# EAGLE board Our Project (EAGLE 9.2.0)
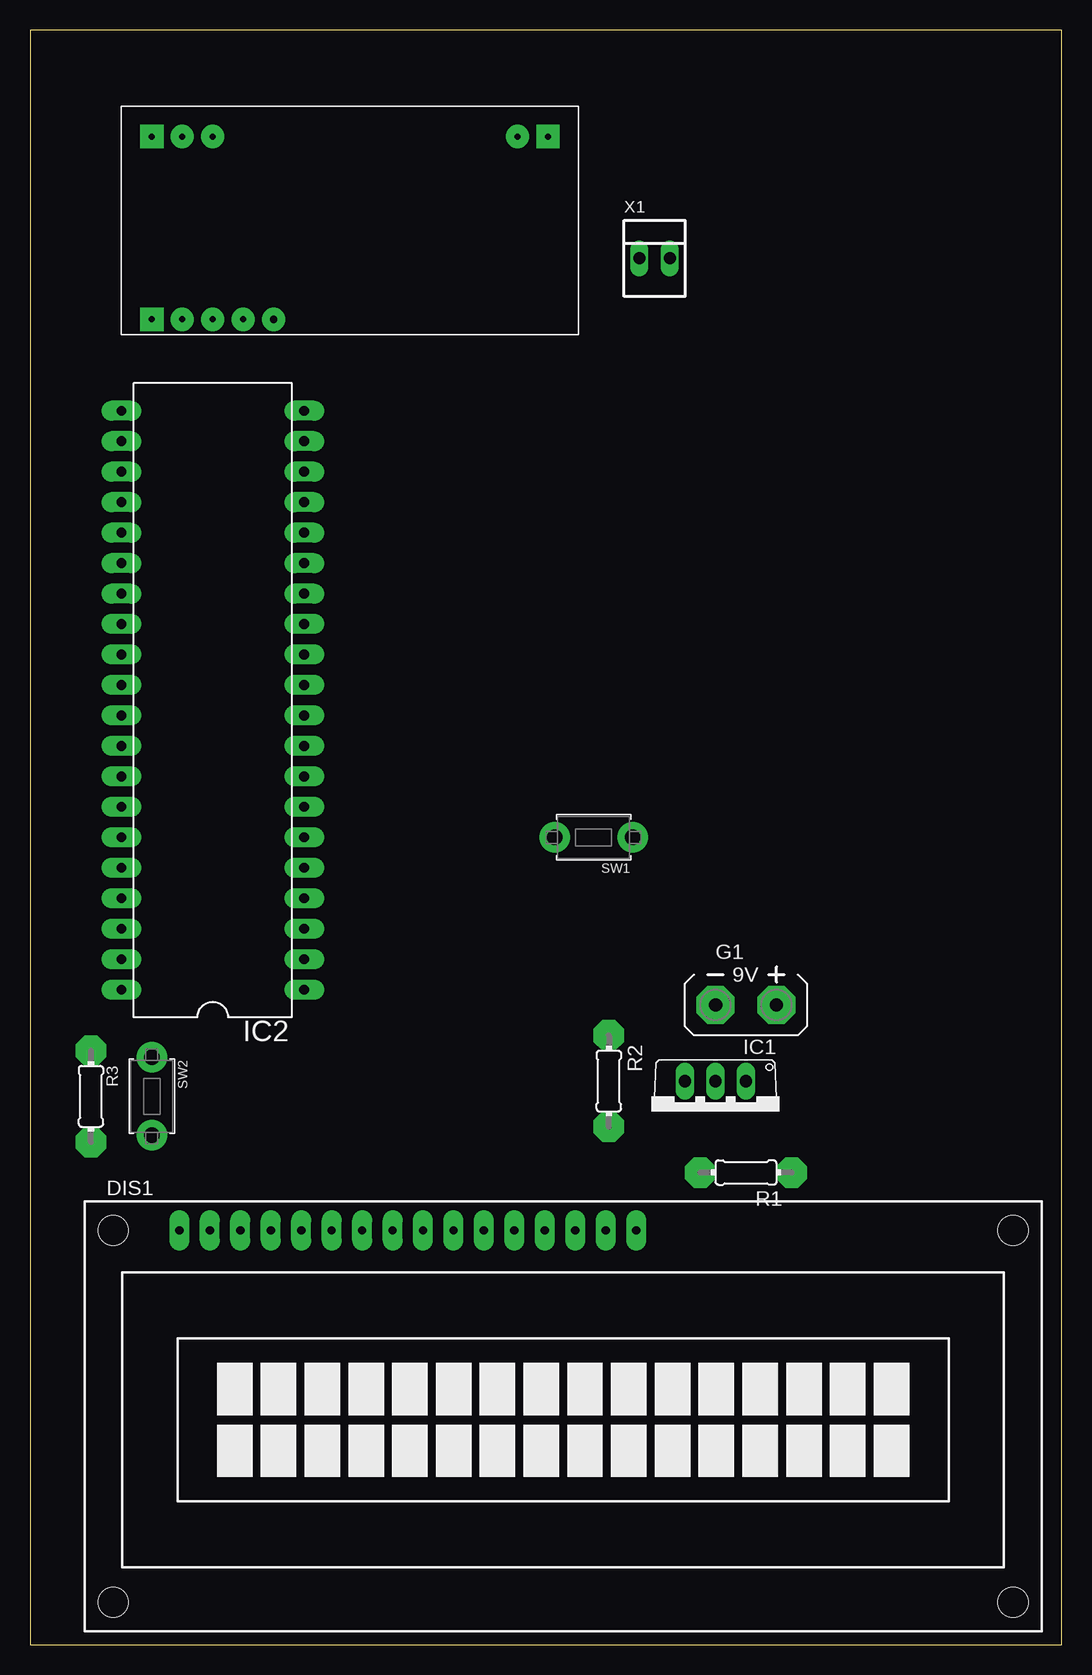
[diagram p0: board, top side]
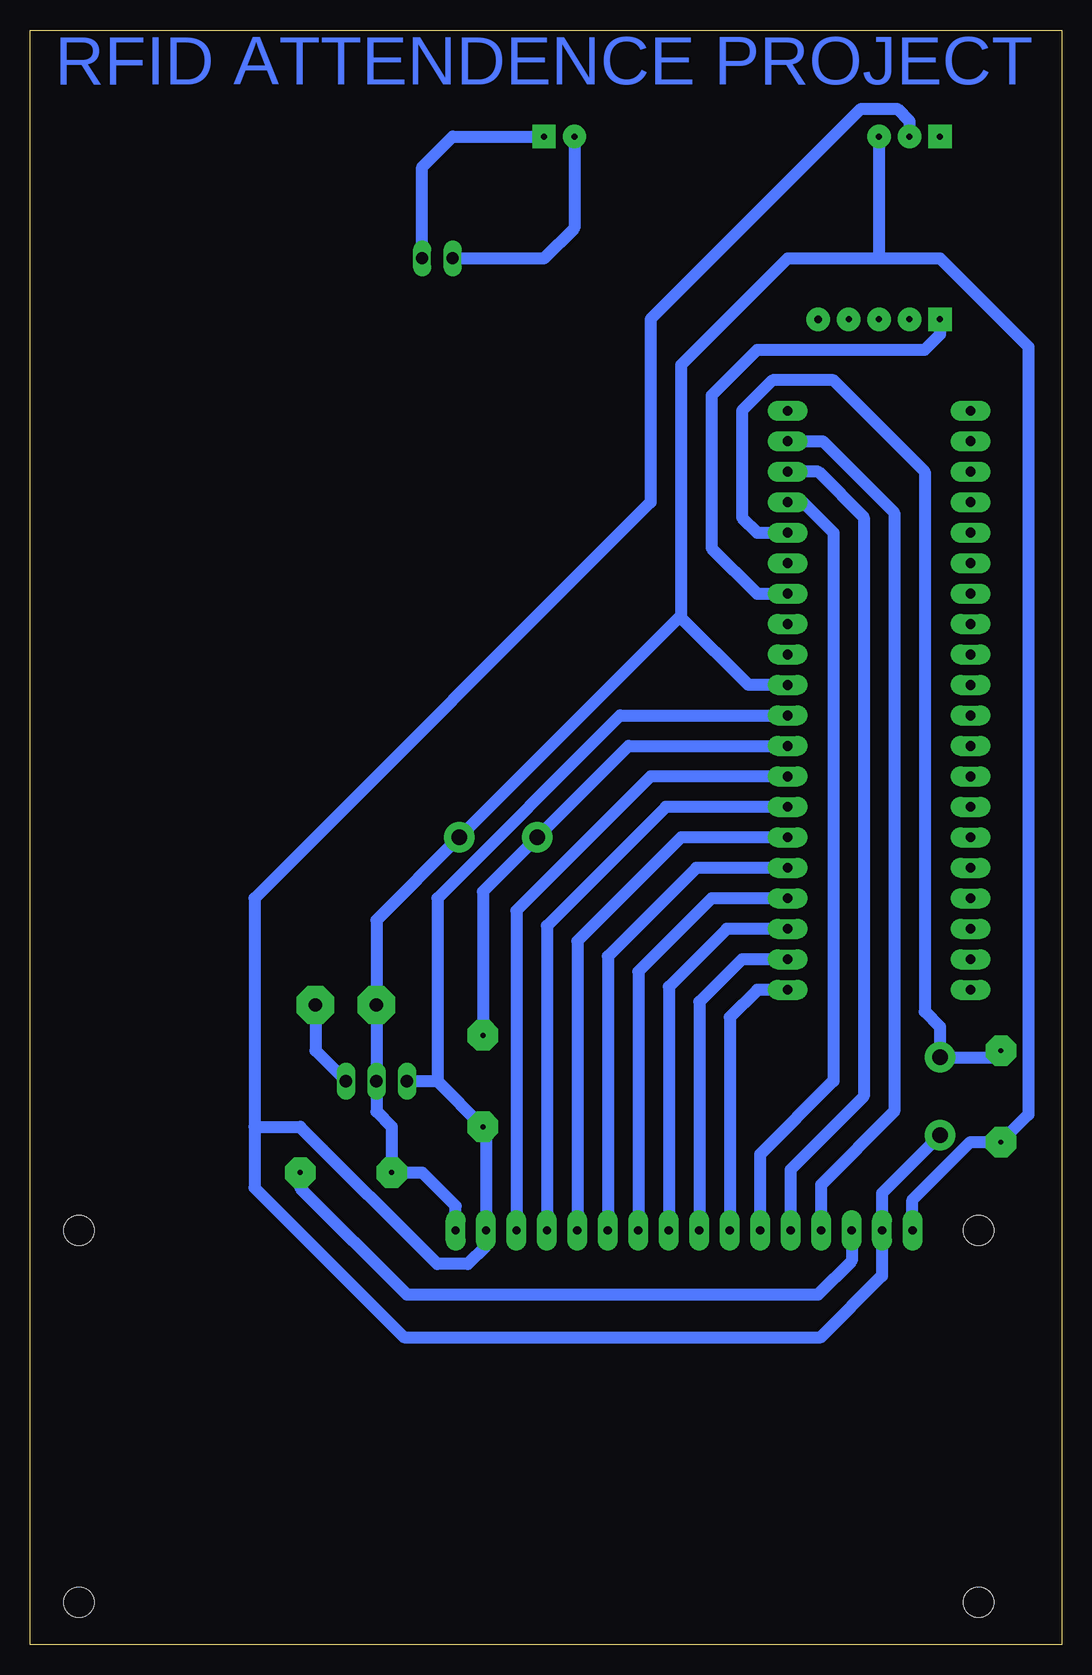
[diagram p1: board, bottom side, seen from below]

Size 86.03 x 134.61 mm. Coordinates in mm from the lower left corner, seen from the top.
Outline: 0,0 86.03,0 86.03,134.61 0,134.61 0,0
Copper layers (1*16): Top 0.035mm / dielectric 1.5mm / Bottom 0.035mm
Design rules "default": minimum track width 6mil, minimum drill 0.35mm, track to track 6mil, track to pad 6mil, pad to pad 6mil, via to via 6mil, smd to smd 6mil, copper to edge 40mil, drill to drill 6mil, minimum pad ring 10mil, minimum via ring 8mil, stop-mask expansion 4mil, vias tented up to drill 0mil, thermal gap 10mil

## Footprints (pad centres in the part's own frame; a part is rotated, then mirrored left to right if it is on the bottom)
TUXGR_16X2_R2 = drill 0.7 pad 1.676 long: 1 -32,15.5; 2 -29.46,15.5; 3 -26.92,15.5; 4 -24.38,15.5; 5 -21.84,15.5; 6 -19.3,15.5; 7 -16.76,15.5; 8 -14.22,15.5; 9 -11.68,15.5; 10 -9.14,15.5; 11 -6.6,15.5; 12 -4.06,15.5; 13 -1.52,15.5; 14 1.02,15.5; 15 3.56,15.5; 16 6.1,15.5 | hole 2.5: -37.5,-15.5; 37.5,-15.5; -37.5,15.5; 37.5,15.5
AB9V = drill 1.118 pad 3.15 octagon: + 0,2.54; - 0,-2.54
TO220V = drill 1.016 long: 1 -2.54,-2.54; 2 0,-2.54; 3 2.54,-2.54
DIL40 = drill 0.813 pad 1.676 long: 1 -24.13,-7.62; 2 -21.59,-7.62; 3 -19.05,-7.62; 4 -16.51,-7.62; 5 -13.97,-7.62; 6 -11.43,-7.62; 7 -8.89,-7.62; 8 -6.35,-7.62; 9 -3.81,-7.62; 10 -1.27,-7.62; 11 1.27,-7.62; 12 3.81,-7.62; 13 6.35,-7.62; 14 8.89,-7.62; 15 11.43,-7.62; 16 13.97,-7.62; 17 16.51,-7.62; 18 19.05,-7.62; 19 21.59,-7.62; 20 24.13,-7.62; 21 24.13,7.62; 22 21.59,7.62; 23 19.05,7.62; 24 16.51,7.62; 25 13.97,7.62; 26 11.43,7.62; 27 8.89,7.62; 28 6.35,7.62; 29 3.81,7.62; 30 1.27,7.62; 31 -1.27,7.62; 32 -3.81,7.62; 33 -6.35,7.62; 34 -8.89,7.62; 35 -11.43,7.62; 36 -13.97,7.62; 37 -16.51,7.62; 38 -19.05,7.62; 39 -21.59,7.62; 40 -24.13,7.62
0204/7 = drill 0.4 pad 2.54 octagon: 1 -3.81,0; 2 3.81,0
KIT.RFID.RDM6300 = drill 0.6 pad 1.93: +5(DC) 6.35,8.89 | drill 0.5 pad 1.93: +5(DC). 13.97,-6.35; ANT2 -13.97,-6.35; DATA1 13.97,8.89; GND 8.89,8.89; GND. 11.43,-6.35; P$12 11.43,8.89 | drill 0.5 pad 1.93 square: ANT1 -16.51,-6.35; DATA0 16.51,8.89; LED 16.51,-6.35
TACT_PANA-EVQ = drill 1.3 pad 2.54: P$1 -3.25,0; P$2 3.25,0
22-23-2021 = drill 1 long: 1 -1.27,0; 2 1.27,0

## Placement (x,y rotation side)
DIS1  TUXGR_16X2_R2  [TUXGR_16X2_R2]  44.45,19.05 0 top
G1  AB9V  [AB9V]  59.69,53.34 270 top
IC1  7805TV  [TO220V]  57.15,44.45 180 top
IC2  MEGA32-P  [DIL40]  15.24,78.74 90 top
R1  [0204/7]  59.69,39.37 180 top
R2  [0204/7]  48.26,46.99 270 top
R3  [0204/7]  5.08,45.72 270 top
RFID.MOKH1  KIT.RFID.RDM6300  [KIT.RFID.RDM6300]  26.67,119.38 180 top
SW1  [TACT_PANA-EVQ]  46.99,67.31 180 top
SW2  [TACT_PANA-EVQ]  10.16,45.72 270 top
X1  22-23-2021  [22-23-2021]  52.07,115.57 0 top

## Library data of the parts
DIS1 = display-lcd; OC_FARNELL: unknown; OC_NEWARK: unknown
G1 = battery
IC1 = linear
IC2 = atmel; MPN: ATMEGA32-16PU; OC_FARNELL: 1661729; OC_NEWARK: 51P1794
R1-R3 = eagle-ltspice; SPICEMODEL: NONE; SPICEPREFIX: R
RFID.MOKH1 = untitled
SW1 SW2 = adafruit
X1 = con-molex; MF: MOLEX; MPN: 22-23-2021; OC_FARNELL: 1462926; OC_NEWARK: 25C3832

## Nets
AVCC: IC2.30
GND: IC2.31
N$1: DIS1.14 IC2.8
N$2: DIS1.13 IC2.7
N$3: DIS1.11 IC2.5
N$4: DIS1.12 IC2.6
N$5: DIS1.4 IC2.19
N$6: DIS1.6 IC2.17
N$7: DIS1.3 R1.1
N$8: IC2.14 RFID.MOKH1.DATA0
N$9: DIS1.2 DIS1.15 IC1.3 IC2.10 R2.2 RFID.MOKH1.+5(DC). SW2.P$2
N$10: DIS1.1 DIS1.16 G1.- IC1.2 IC2.11 R1.2 R3.2 RFID.MOKH1.GND. SW1.P$1
N$11: IC2.9 R2.1 SW1.P$2
N$12: IC2.16 R3.1 SW2.P$1
N$13: G1.+ IC1.1
N$14: DIS1.10 IC2.4
N$15: DIS1.9 IC2.3
N$16: DIS1.8 IC2.2
N$17: DIS1.7 IC2.1
N$18: RFID.MOKH1.ANT1 X1.2
N$19: RFID.MOKH1.ANT2 X1.1
N$20: DIS1.5 IC2.18
N$22: RFID.MOKH1.+5(DC)

## Tracks (layer width: path | path; a pad name or v marks a point on that pad's centre or on a via)
N$1
  Bottom 1.016: IC2.8 34.29,72.39 45.47,61.21 DIS1.14
N$2
  Bottom 1.016: IC2.7 33.02,69.85 42.93,59.94 DIS1.13
N$3
  Bottom 1.016: IC2.5 30.48,64.77 37.85,57.4 DIS1.11
N$4
  Bottom 1.016: IC2.6 31.75,67.31 40.39,58.67 DIS1.12
N$5
  Bottom 1.016: IC2.19 19.94,100.33 13.97,94.36 13.97,44.45 20.07,38.35 DIS1.4
N$6
  Bottom 1.016: DIS1.6 25.15,40.89 19.05,46.99 19.05,92.71 21.59,95.25 IC2.17
N$7
  Bottom 1.016: DIS1.3 17.53,32.01 20.33,29.21 54.61,29.21 63.5,38.1 R1.1
N$8
  Bottom 1.016: IC2.14 25.4,87.63 29.21,91.44 29.21,104.14 25.4,107.95 11.43,107.95 10.16,109.22 RFID.MOKH1.DATA0
N$9
  Bottom 1.016: IC2.10 36.83,77.47 52.07,62.23 52.07,46.99 | 67.31,43.18 67.31,62.23 34.29,95.25 34.29,110.49 16.75,128.03 13.73,128.03 12.7,127 RFID.MOKH1.+5(DC). | 67.31,43.18 67.31,38.1 54.86,25.65 20.08,25.65 14.99,30.74 DIS1.2 14.99,37.64 SW2.P$2 | DIS1.15 48.26,34.3 | DIS1.15 48.01,33.27 49.53,31.75 52.07,31.75 63.5,43.18 67.31,43.18 | DIS1.15 48.01,42.93 R2.2 52.07,46.99 | IC1.3 52.07,46.99
N$10
  Bottom 1.016: DIS1.16 50.55,36.58 53.34,39.37 R1.2 55.88,43.18 57.15,44.45 IC1.2 G1.- 57.15,60.4 SW1.P$1 31.82,85.72 31.75,85.65 | IC2.11 26.11,80.01 31.75,85.65 | 15.24,115.57 10.16,115.57 2.79,108.2 2.79,44.2 R3.2 7.63,41.91 12.45,37.09 DIS1.1 | 31.75,85.65 31.75,106.68 22.86,115.57 15.24,115.57 | RFID.MOKH1.GND. 15.24,115.57
N$11
  Bottom 1.016: R2.1 48.26,62.79 SW1.P$2 36.12,74.93 IC2.9
N$12
  Bottom 1.016: R3.1 5.64,48.97 SW2.P$1 10.16,51.51 11.43,52.78 11.43,97.79 19.05,105.41 24.13,105.41 26.67,102.87 26.67,93.98 25.4,92.71 IC2.16
N$13
  Bottom 1.016: G1.+ 62.23,49.53 IC1.1
N$14
  Bottom 1.016: IC2.4 29.21,62.23 35.31,56.13 DIS1.10
N$15
  Bottom 1.016: IC2.3 27.94,59.69 32.77,54.86 DIS1.9
N$16
  Bottom 1.016: IC2.2 26.67,57.15 30.23,53.59 DIS1.8
N$17
  Bottom 1.016: IC2.1 25.4,54.61 27.69,52.32 DIS1.7
N$18
  Bottom 1.016: X1.2 53.34,123.19 50.8,125.73 RFID.MOKH1.ANT1
N$19
  Bottom 1.016: RFID.MOKH1.ANT2 40.64,118.11 43.18,115.57 X1.1
N$20
  Bottom 1.016: DIS1.5 22.61,39.62 16.51,45.72 16.51,93.98 20.32,97.79 IC2.18

## Text on the board
Bottom: RFID ATTENDENCE PROJECT